# Altium PCB integradorleg.PcbDoc
Units mm, origin at the board's own origin, x right, y up, seen from the top; angles counter-clockwise.
Board outline 50.29 x 50.17 mm, 2 copper layers (Top Layer, Bottom Layer); 15 components, 9 nets, 37 pads, 7 vias.
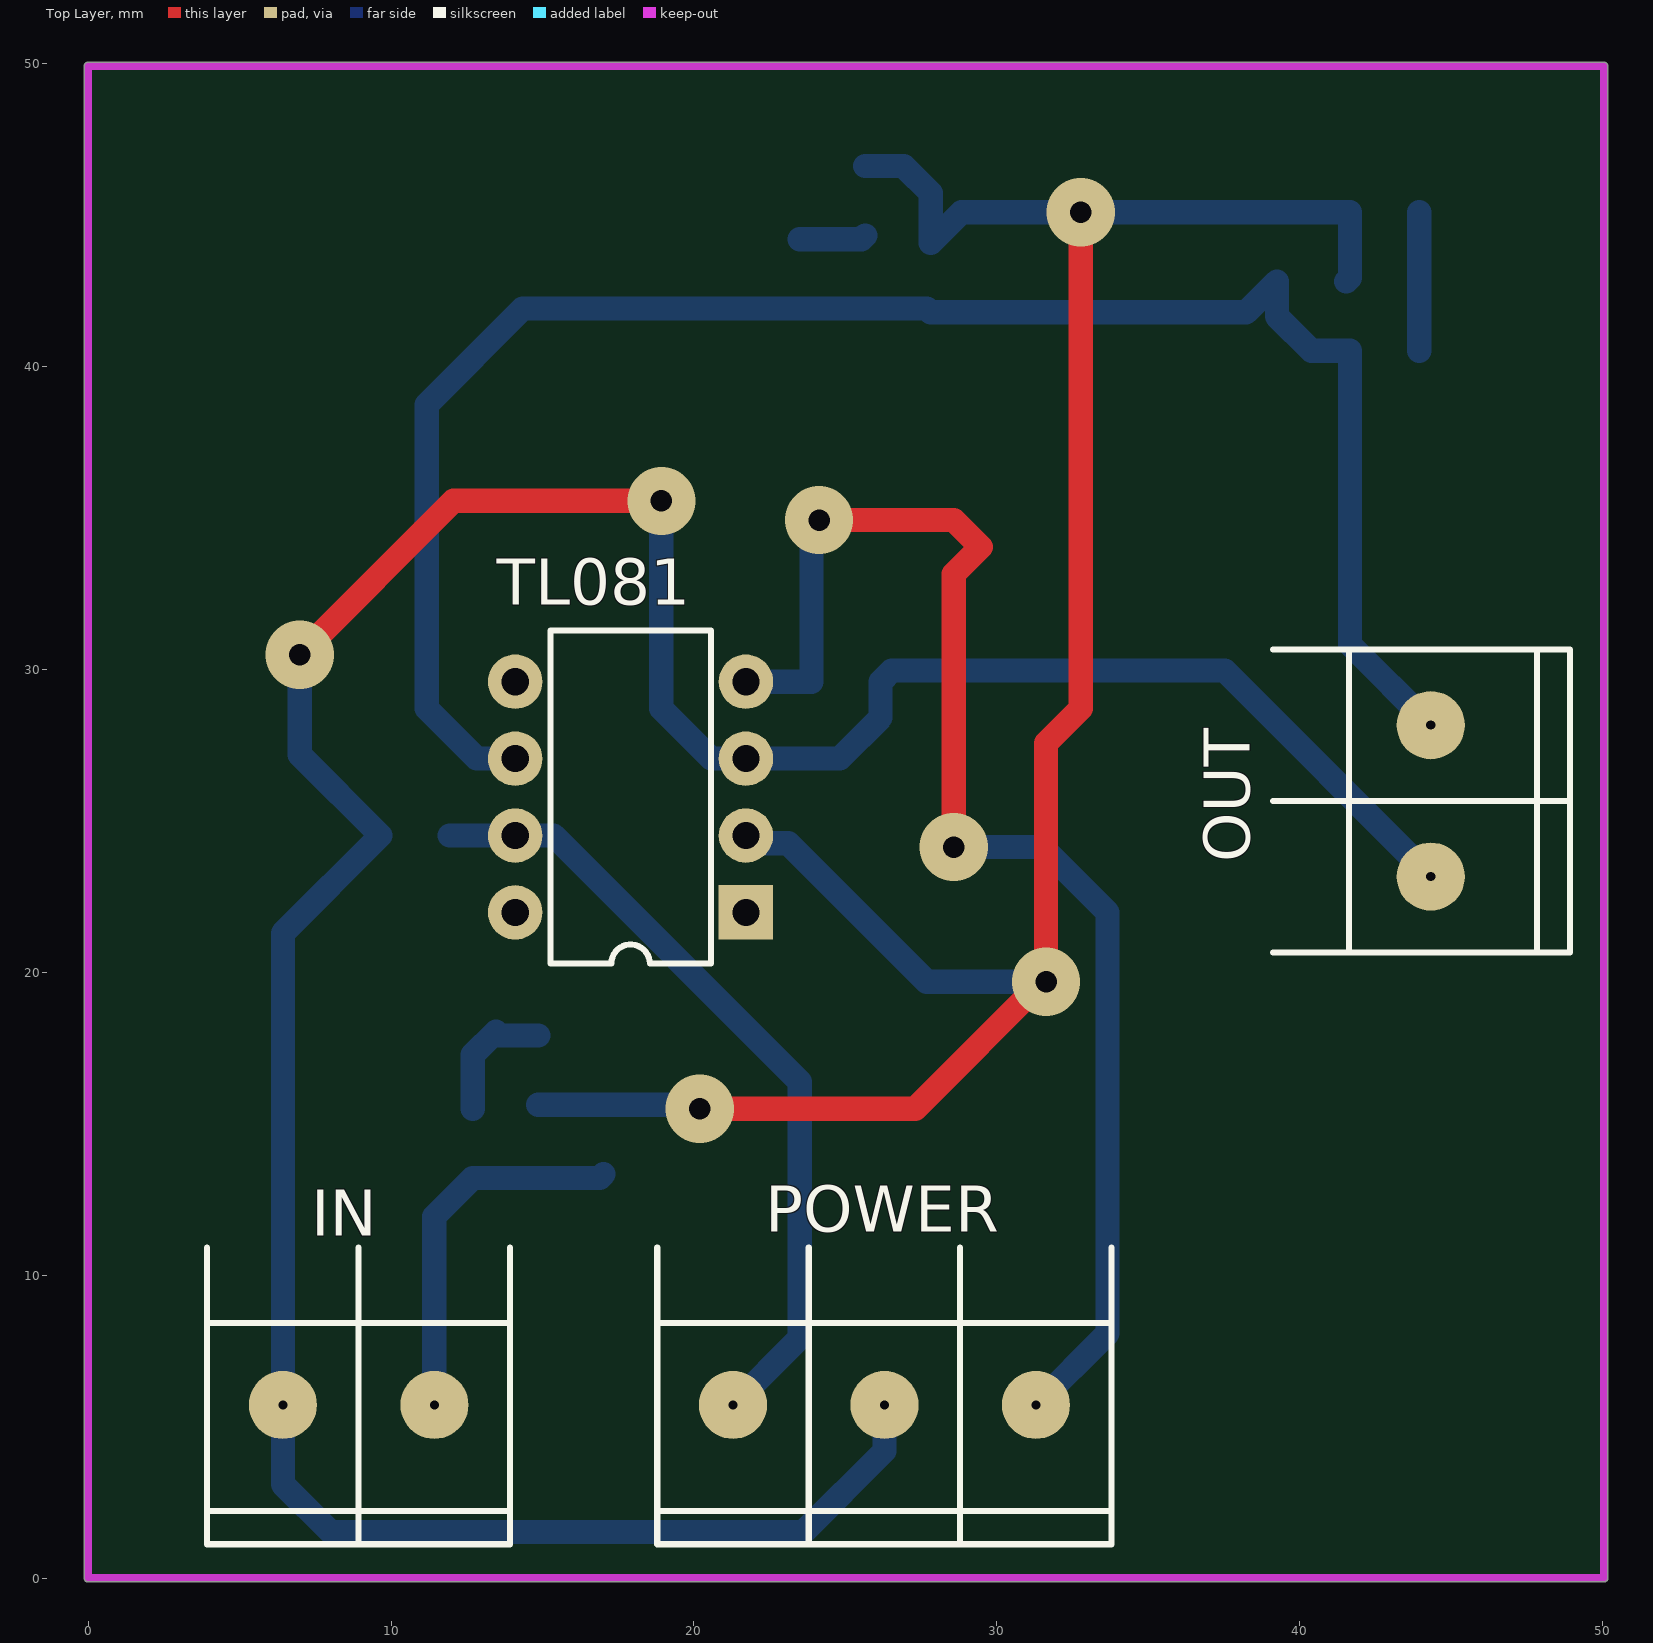
[diagram p0: Top Layer view]
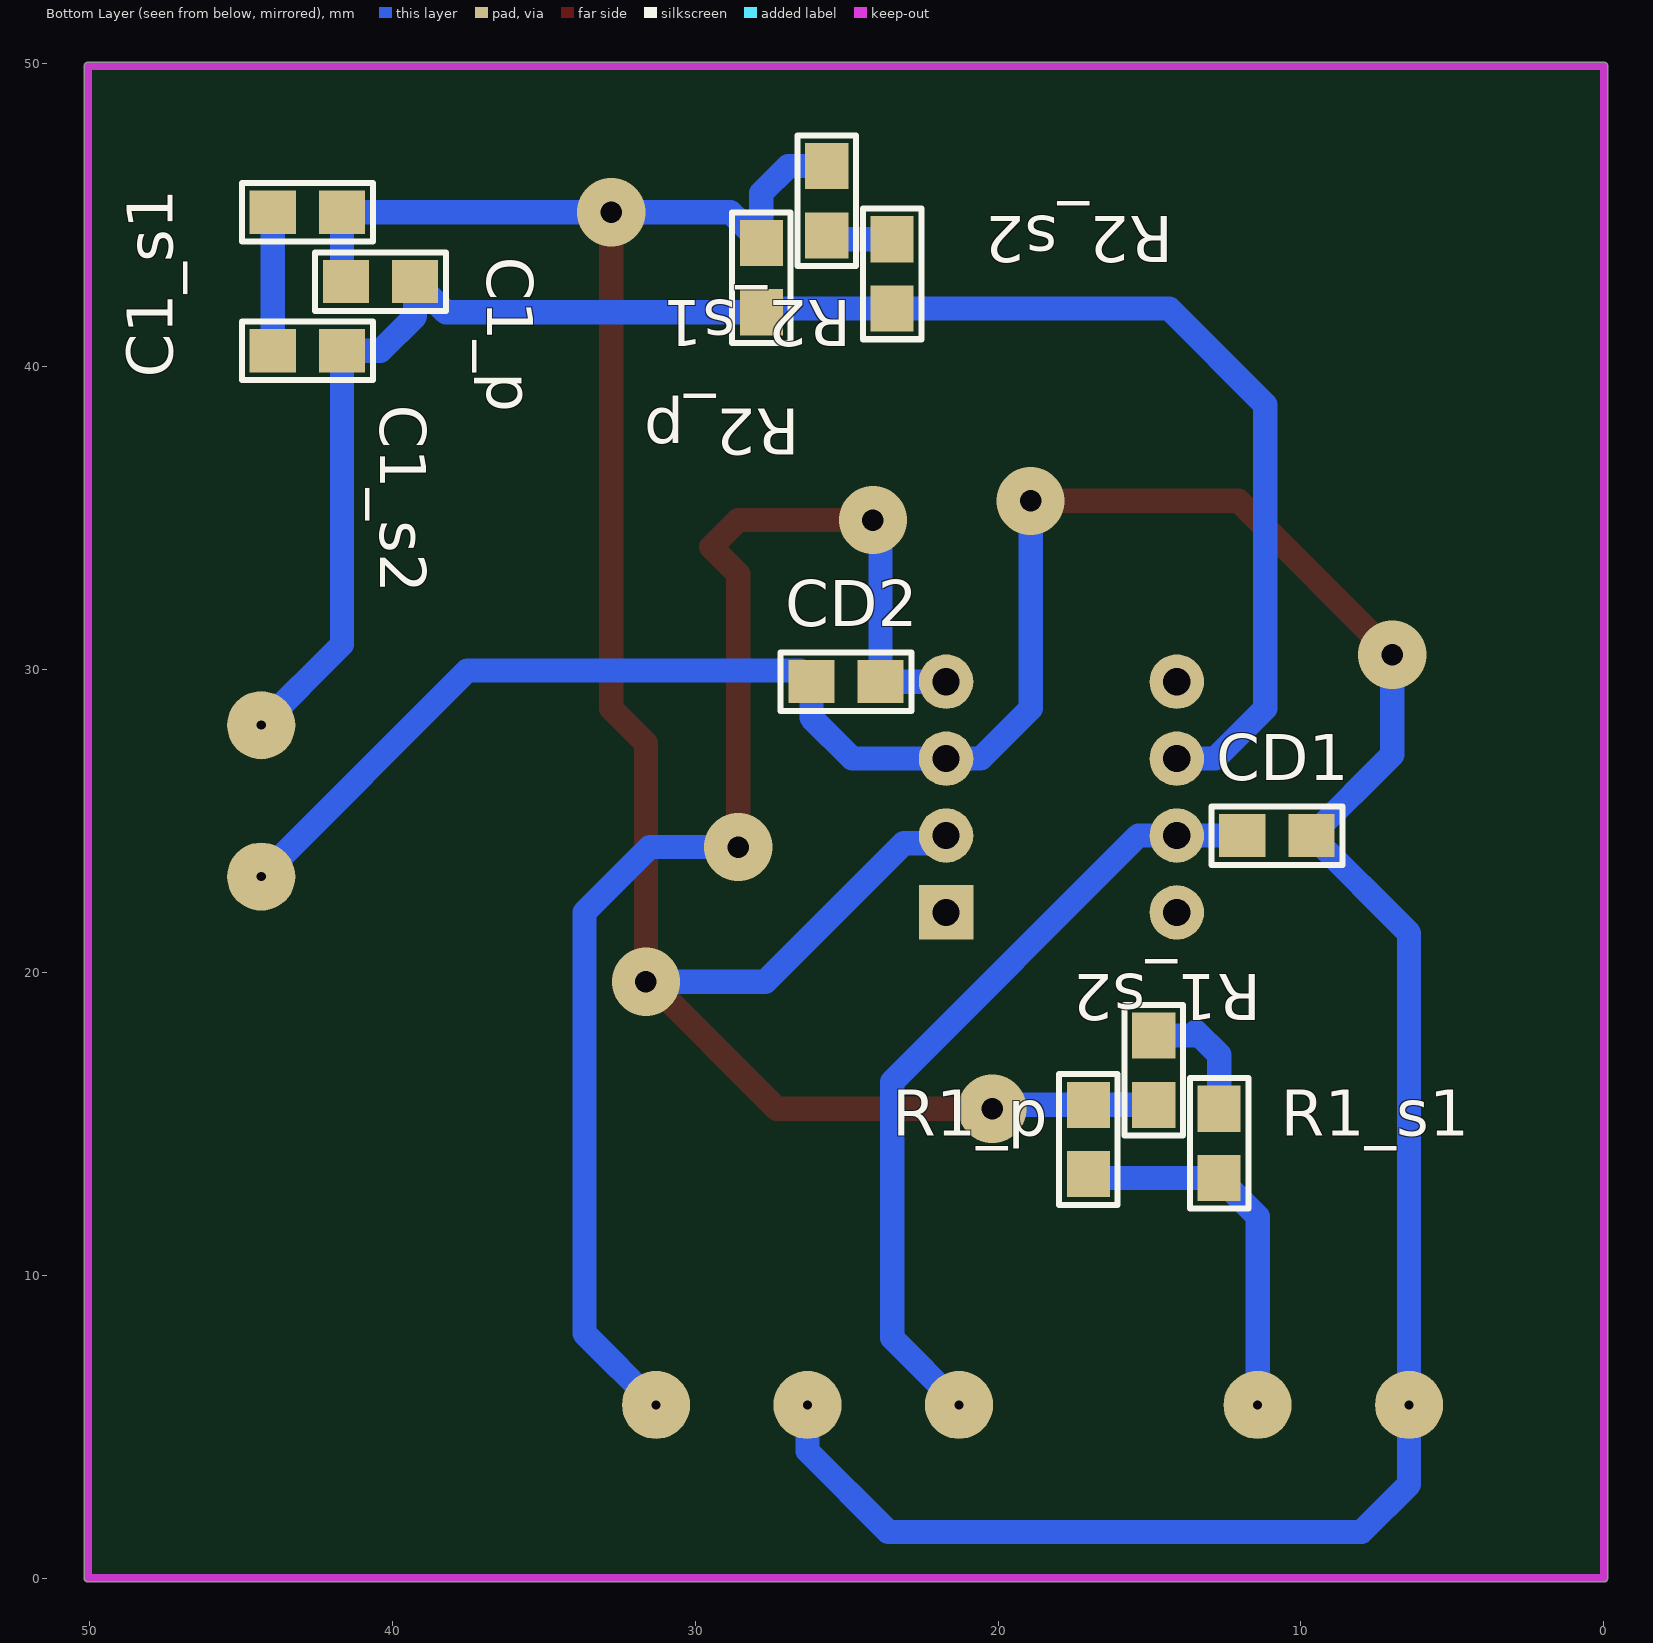
[diagram p1: Bottom Layer view, seen from below]
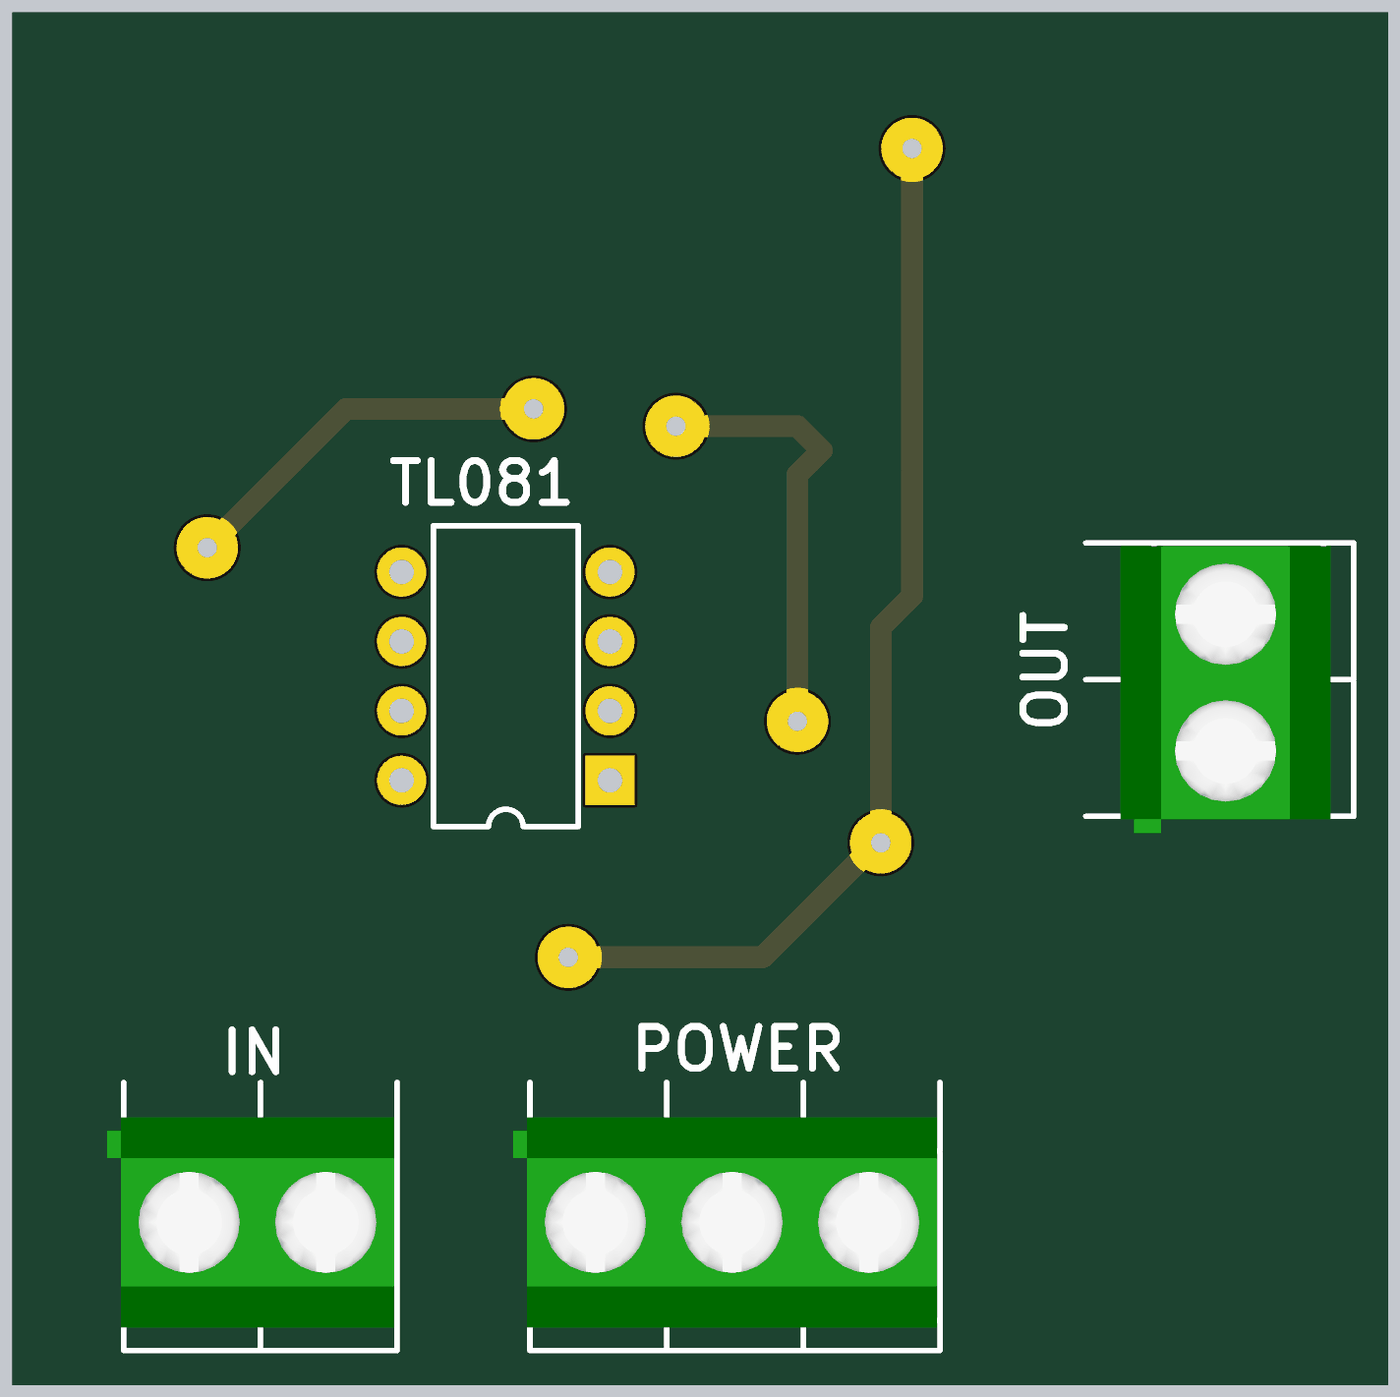
[diagram p2: 3D render of the assembled board from above, using the file's embedded part models]
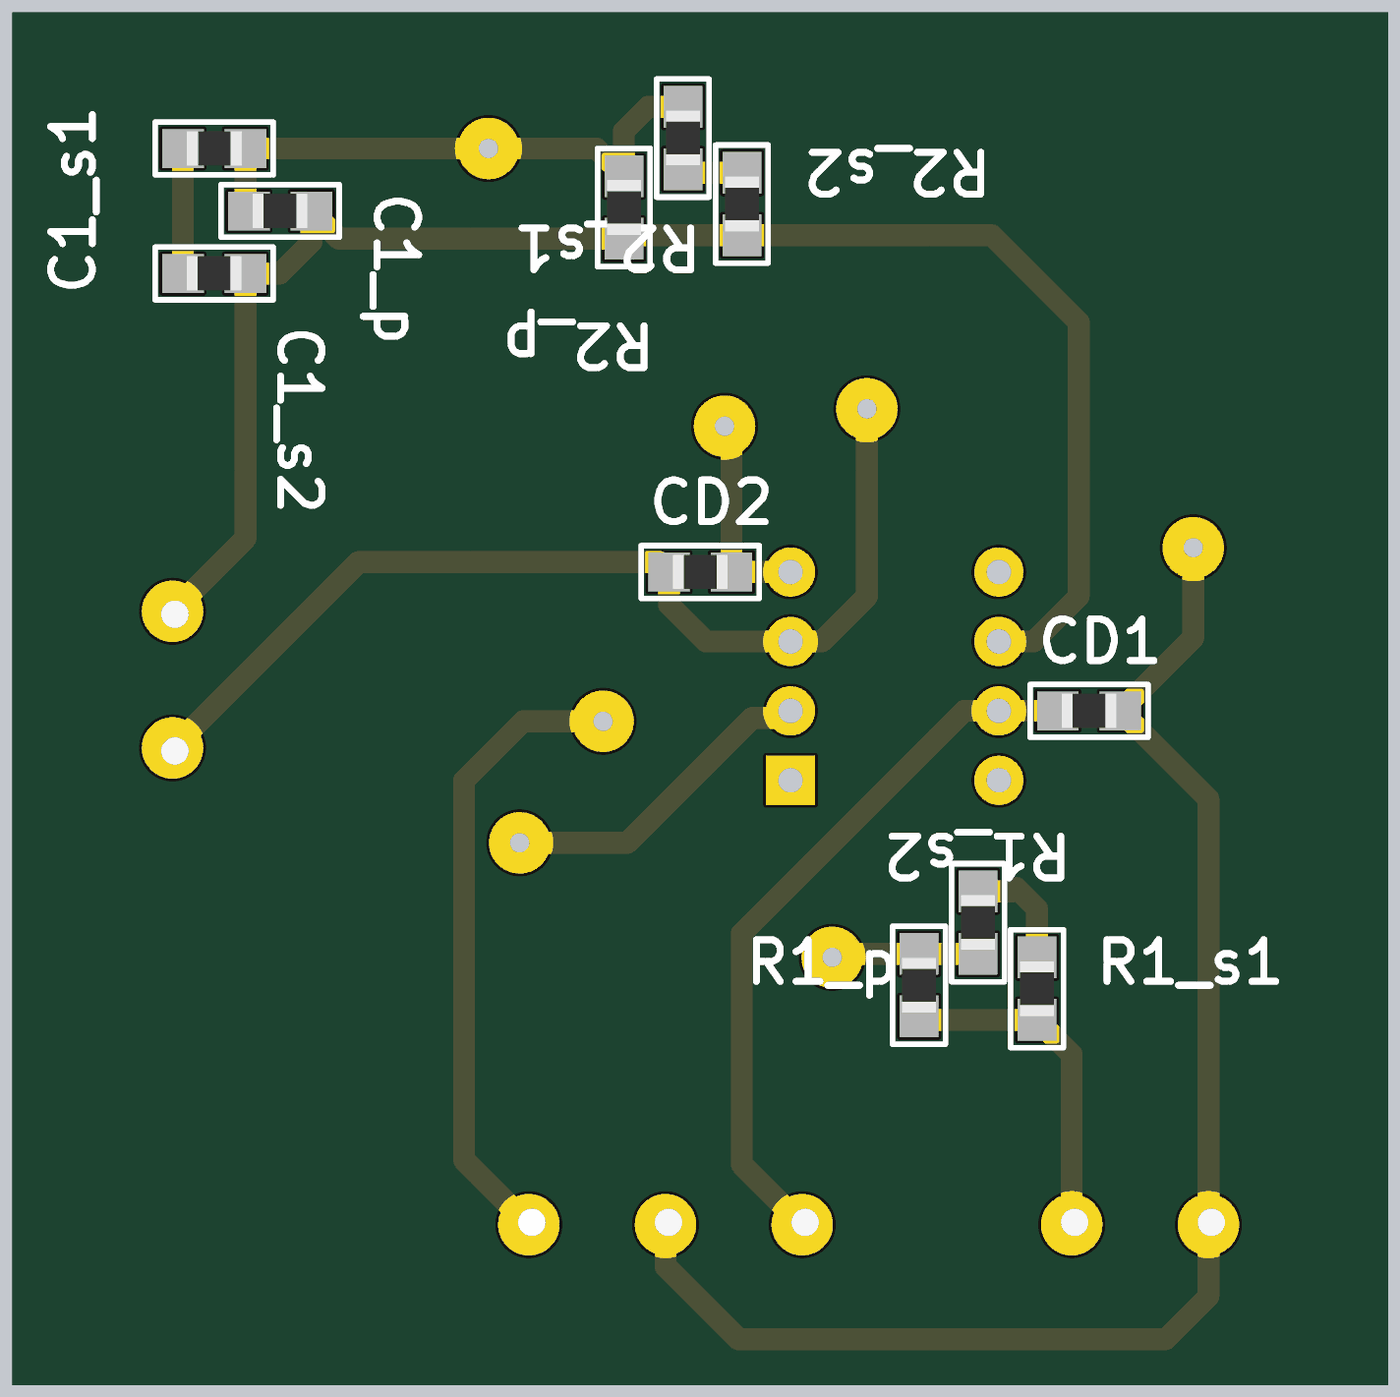
[diagram p3: 3D render of the assembled board from below, using the file's embedded part models]

## Layer stack, top to bottom
Top Solder: solder mask 0.0102, Solder Resist, Dk 3.5
Top Layer: signal copper 0.0356
Dielectric 1: dielectric 0.32, FR-4, Dk 4.8
Bottom Layer: signal copper 0.0356
Bottom Solder: solder mask 0.0102, Solder Resist, Dk 3.5

## Board outline
-0.127,0 ccw(c0,0) 0,-0.127 50,-0.127 ccw(c50,0) 50.019,-0.126 ccw(c50.038,0) 50.165,0 50.165,49.911 ccw(c50.038,49.911) 50.038,50.038 0,50.038 ccw(c0,49.911) -0.127,49.911

## Design rules (kind name [scope] priority, off if disabled: settings)
Clearance [All] p1: gap=0.6 ignorepadtopadclearanceinfootprint=FALSE
PolygonConnect [All] p1: connectstyle=Relief reliefconductorwidth=0.254 reliefentries=4 polygonreliefangle="90 Angle" airgapwidth=0.254
RoutingVias [All] p1: holewidth=0.711 width=1.27 viastyle="Through Hole" minholewidth=0.711 minwidth=1.27 maxholewidth=0.711 maxwidth=1.27
SolderMaskExpansion [All] p1: expansion=0.102
Width [All] p1: maxlimit=0.8 minlimit=0.8 preferedwidth=0.8
30 further rules are at their usual default settings.

## Components (designator, comment, footprint, x,y, rotation, side; value= is the part's Value field where it differs from the comment)
C1_p "CAP" 0805 40.386,42.799 r180 bottom
C1_s1 "CAP" 0805 42.799,45.085 r0 bottom
C1_s2 "CAP" 0805 42.799,40.513 r180 bottom
CD1 "CAP" 0805 10.795,24.511 r180 bottom
CD2 "CAP" 0805 25.019,29.591 r180 bottom
IN "BORNERA 2" BORNERA2 8.93,5.715 r90 top
OUT "BORNERA 2" BORNERA2 44.323,25.654 r180 top
POWER "BORNERA 3" BORNERA3 26.289,5.715 r90 top
R1_p "270" 0805 17.018,14.478 r90 bottom
R1_s1 "270" 0805 12.7,14.351 r90 bottom
R1_s2 "270" 0805 14.859,16.764 r270 bottom
R2_p "270" 0805 27.813,42.926 r270 bottom
R2_s1 "270" 0805 25.654,45.466 r270 bottom
R2_s2 "270" 0805 23.495,43.053 r270 bottom
TL081 "TL081P" P008 17.907,25.781 r90 top

## Footprints (in the part's own frame and the unit in brackets; to place one, negate y for a bottom-side part, rotate by r counter-clockwise, add the part's x,y. Pads: shape width x height; smd on the part's side, far side on the other; paste and mask are expansions set on the pad)
0805 [mil] "Pasivo 0805"
  rect 60x56 smd: 1(-45,0) 2(45,0)
  silkscreen extent -85,-38 85,38, body extent -39,-25 39,25, height 15
BORNERA2 [mm] "Bornera con Tornillos 5mm separación"
  round 2.25 hole 0.3: 1(0,2.5) 2(0,-2.5)
  silkscreen extent -4.6,-5 5.2,5, body extent -3.76,-4.89 3.94,5.61, height 10
BORNERA3 [mm] "Bornera con Tornillos 5mm separación"
  round 2.25 hole 0.3: 1(0,5) 2(0,0) 3(0,-5)
  silkscreen extent -4.6,-7.5 5.2,7.5, body extent -3.76,-7.39 3.94,8.11, height 10.05
P008 [mm] "DIP; 8 Leads; Row Spacing 7.62 mm; Pitch 2.54 mm"
  rect 1.8x1.8 hole 0.9: 1(-3.81,-3.81)
  round 1.8 hole 0.9: 2(-1.27,-3.81) 3(1.27,-3.81) 4(3.81,-3.81) 5(3.81,3.81) 6(1.27,3.81) 7(-1.27,3.81) 8(-3.81,3.81)
  silkscreen extent -5.5,-2.65 5.5,2.65

## Part data
R1_p R1_s1 R1_s2 R2_p R2_s1 R2_s2: library part RES
TL081: "JFET-Input Operational Amplifier", Code_JEDEC=MO-001-AN, ComponentLink1Description="Manufacturer Link", ComponentLink1URL=http://www.ti.com/, ComponentLink2Description=Datasheet, ComponentLink2URL=http://www-s.ti.com/sc/ds/tl081.pdf, DatasheetVersion=Feb-1999, LatestRevisionDate=04-Mar-2005, LatestRevisionNote="Stylized 3D Model Added.", Note="Pin 8 is not connected", PackageDescription="DIP; 8 Leads; Row Spacing 7.62 mm; Pitch 2.54 mm", PackageReference=P008, PackageVersion=Jun-1999, Published=16-Jan-2001, Publisher="Altium Limited"

## Via types
v1: diameter 2.25, hole 0.711, Top Layer to Bottom Layer, 7 vias

## Nets (pads, with @x,y where several pads share a name; then routed paths per layer and width w, separated by ;. In a path a pad name is that pad's centre, name@x,y a point inside that pad or via, vN(x,y) a via of type N, cw(c..) or ccw(c..) an arc to the next point about the centre after c; other vN are vias at no path point)
-VCC: CD2.2 POWER.3 TL081.4 | length 46.4
  Top Layer w0.8: v1(24.13,34.925) 28.575,34.925 29.464,34.036 28.575,33.147 v1@28.575,24.511
  Bottom Layer w0.8: TL081.4 CD2.2 23.876,34.671 v1(24.13,34.925) ; v1(28.575,24.13) 31.496,24.13 33.655,21.971 33.655,8.081 POWER.3
GND: CD1.2 CD2.1 IN.1 OUT.1 POWER.2 TL081.3 | length 104.7
  Top Layer w0.8: v1(6.985,30.48) 12.065,35.56 v1(18.923,35.56)
  Bottom Layer w0.8: v1(6.985,30.48) 6.985,27.178 CD1.2 6.43,21.289 IN.1 6.43,3.095 8.001,1.524 23.622,1.524 26.289,4.191 POWER.2 ; v1(18.923,35.56) 18.923,28.702 20.574,27.051 TL081.3 24.809,27.051 26.162,28.404 CD2.1 26.529,29.958 37.519,29.958 OUT.1
NetC1_p_1: C1_p.1 C1_s1.1 R1_p.2 R1_s2.2 R2_p.1 R2_s1.1 TL081.2 | length 76.9
  Top Layer w0.8: v1(20.193,15.494) 27.305,15.494 v1@31.623,19.812 ; v1(31.623,19.685) v1@31.623,19.812 ; v1(32.766,45.085) 32.766,28.702 31.623,27.559 v1@31.623,19.812
  Bottom Layer w0.8: R1_s2.2 R1_p.2 v1@19.685,15.621 ; TL081.2@21.343,24.511 TL081.2 ; TL081.2@21.717,24.257 23.114,24.257 27.686,19.685 v1(31.623,19.685) ; R2_s1.1 26.924,46.609 27.813,45.72 R2_p.1 28.829,45.085 v1(32.766,45.085) C1_s1.1 41.656,42.926 C1_p.1
NetC1_p_2: C1_p.2 C1_s2.2 OUT.2 R2_p.2 R2_s2.2 TL081.6 | length 61
  Bottom Layer w0.8: TL081.6 12.827,27.051 11.176,28.702 11.176,38.735 14.351,41.91 R2_s2.2 27.686,41.91 R2_p.2 38.227,41.783 C1_p.2 39.243,41.656 40.386,40.513 C1_s2.2 41.656,30.821 OUT.2
NetC1_s1_2: C1_s1.2 C1_s2.1 | length 4.6
  Bottom Layer w0.8: C1_s2.1 C1_s1.2
NetIN_2: IN.2 R1_p.1 R1_s1.1 | length 12.4
  Bottom Layer w0.8: IN.2 11.43,11.938 R1_s1.1 16.891,13.208 R1_p.1
NetR1_s1_2: R1_s1.2 R1_s2.1 | length 4.3
  Bottom Layer w0.8: R1_s1.2 12.7,17.272 13.462,18.034 13.589,17.907 R1_s2.1
NetR2_s1_2: R2_s1.2 R2_s2.1 | length 2.2
  Bottom Layer w0.8: R2_s2.1 25.527,44.196 R2_s1.2
VCC: CD1.1 POWER.1 TL081.7 | length 26.5
  Bottom Layer w0.8: CD1.1 TL081.7 15.367,24.511 23.495,16.383 23.495,7.921 POWER.1
pads on no net: TL081.1 TL081.5 TL081.8

## Keep-outs
Keep-Out Layer:
  lines w0.254: 50,0 0,0 0,49.911 50.038,49.911 50.038,0